# Altium PCB 天地通门禁20813.PcbDoc (part 1 of 2)
Units mm, origin at the board's own origin, x right, y up, seen from the top; angles counter-clockwise.
Board outline 102.79 x 72.64 mm, 2 copper layers (Top Layer, Bottom Layer); 108 components, 65 nets, 314 pads, 370 vias.
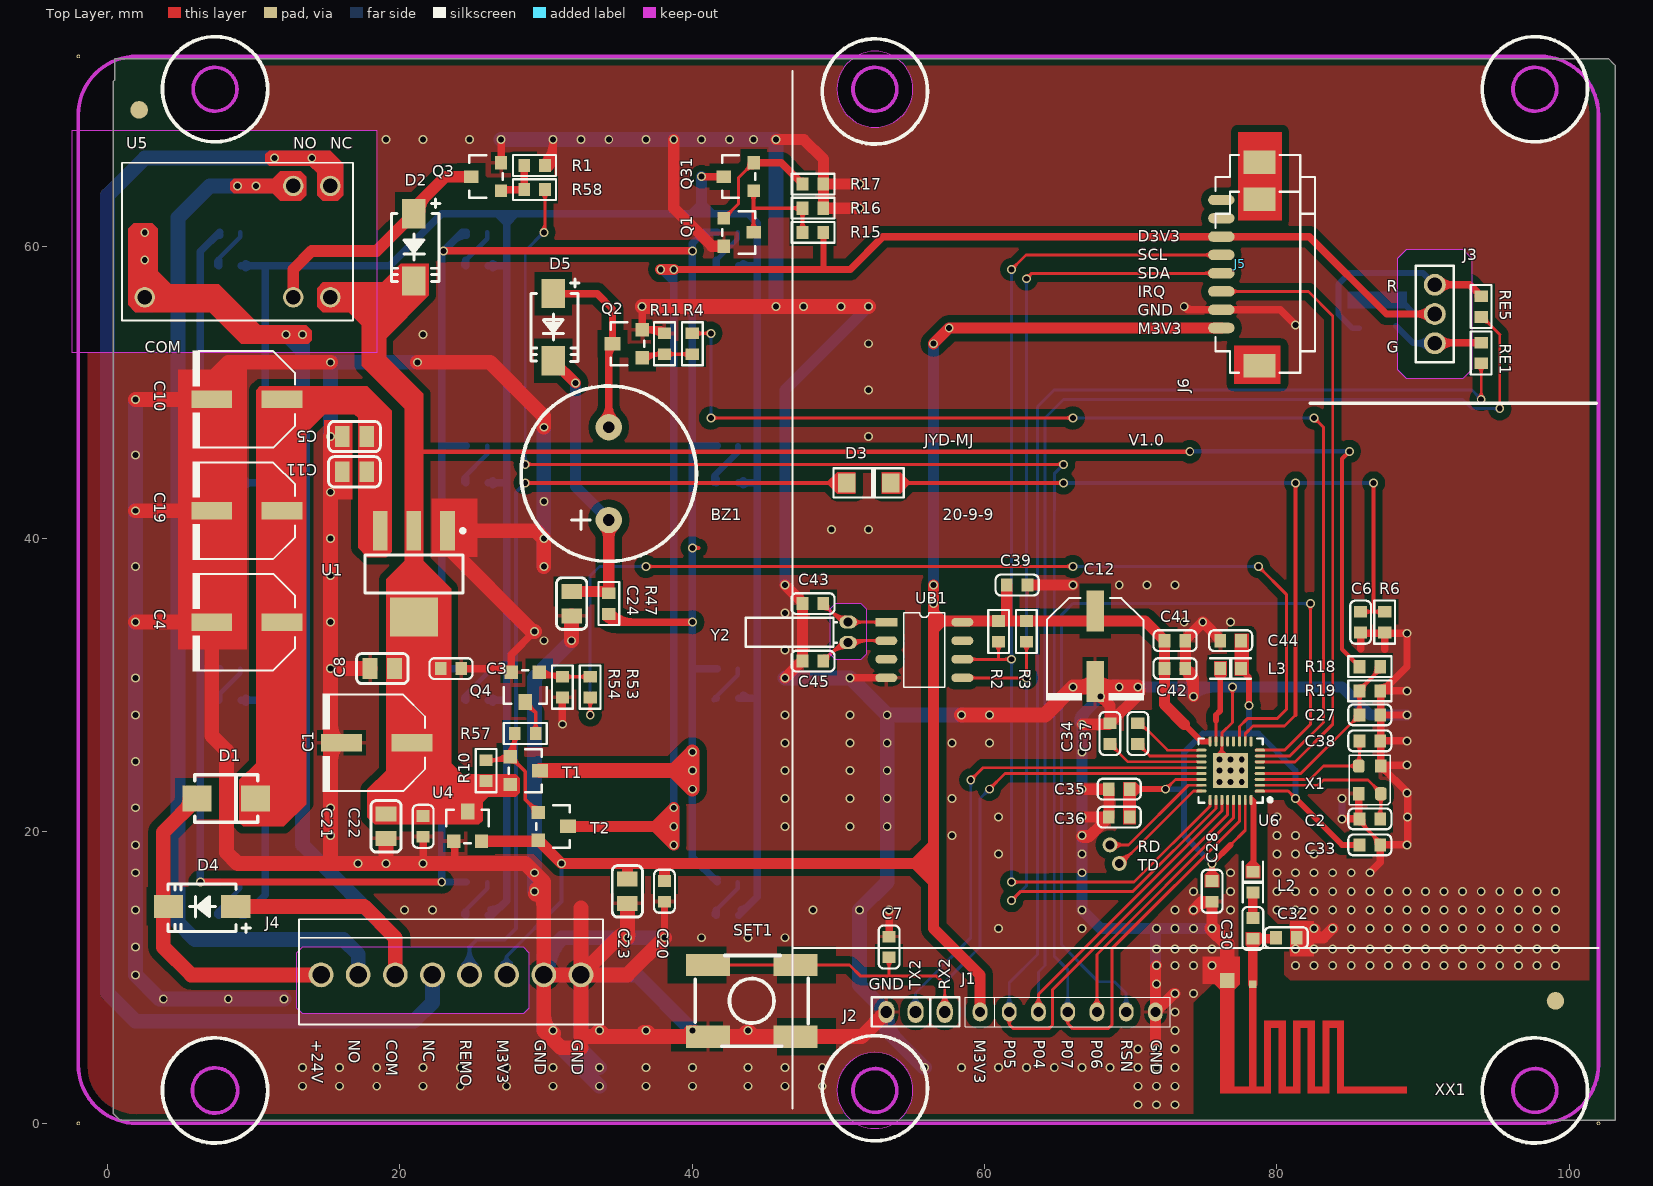
[diagram p0: Top Layer view]
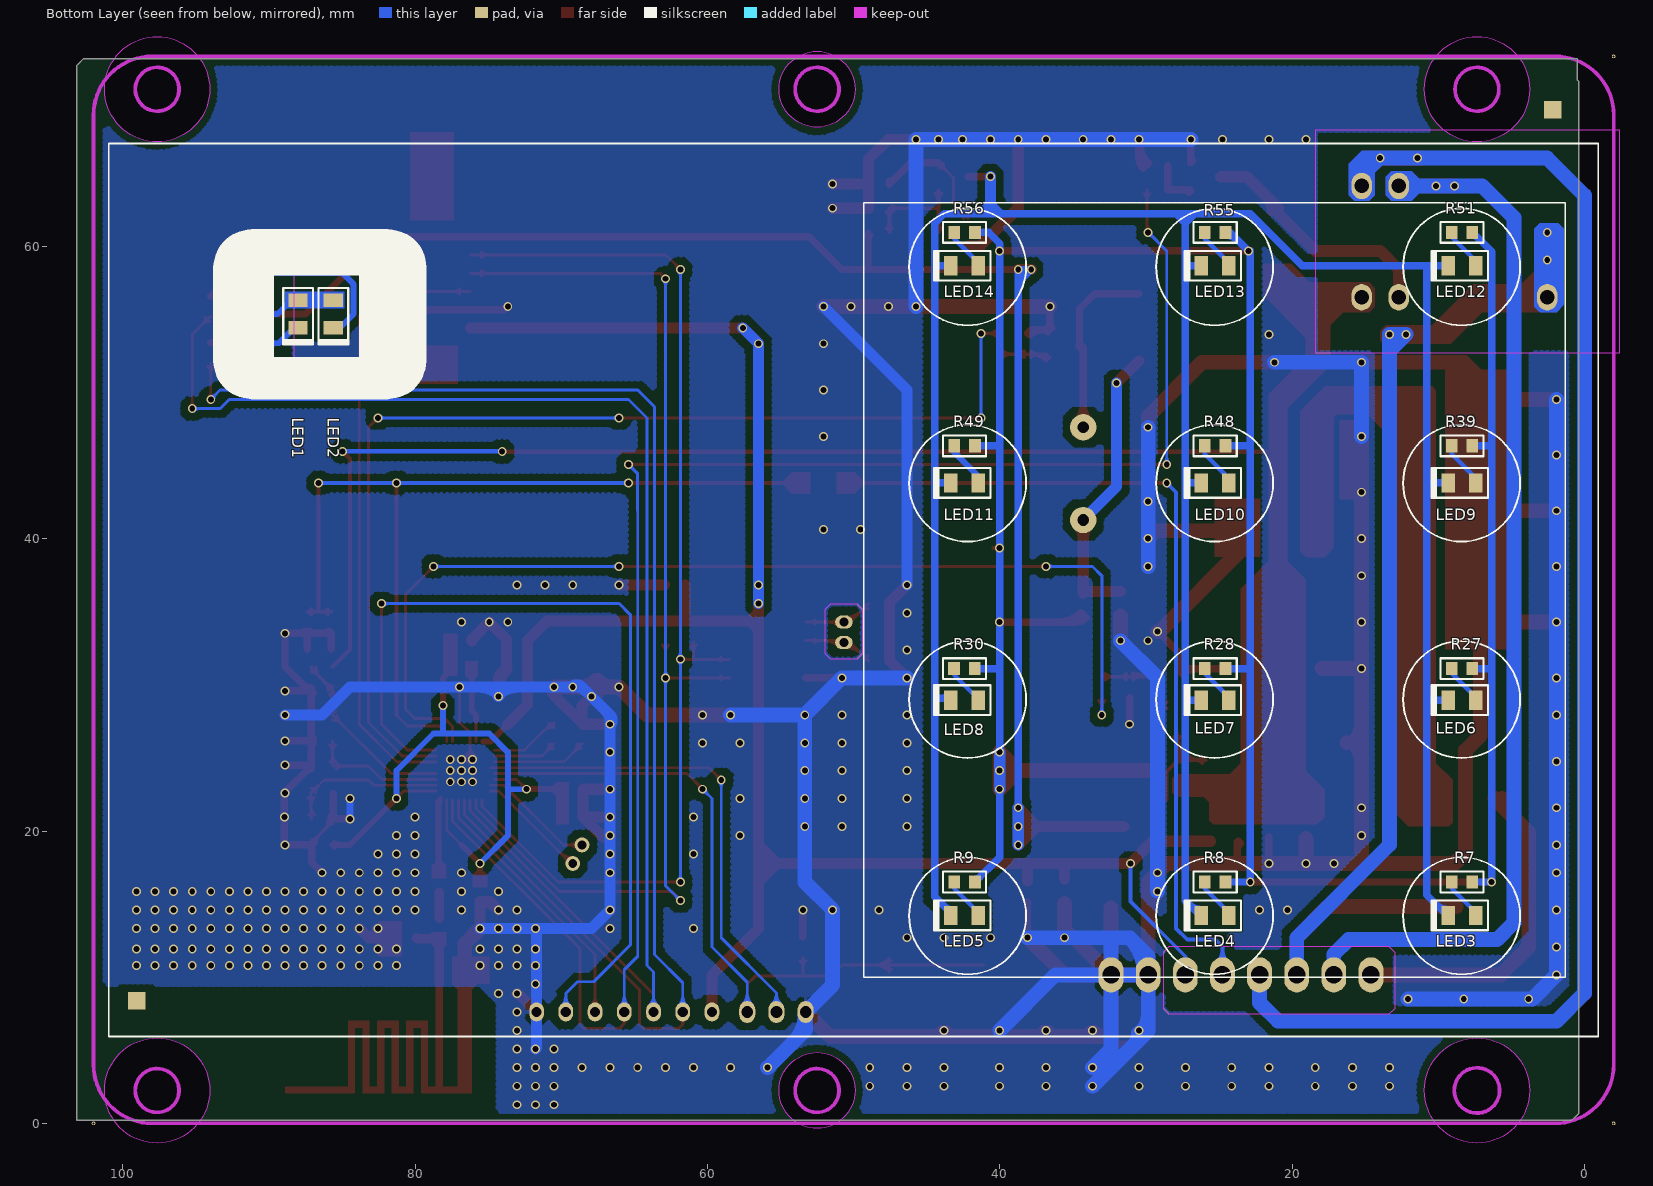
[diagram p1: Bottom Layer view, seen from below]
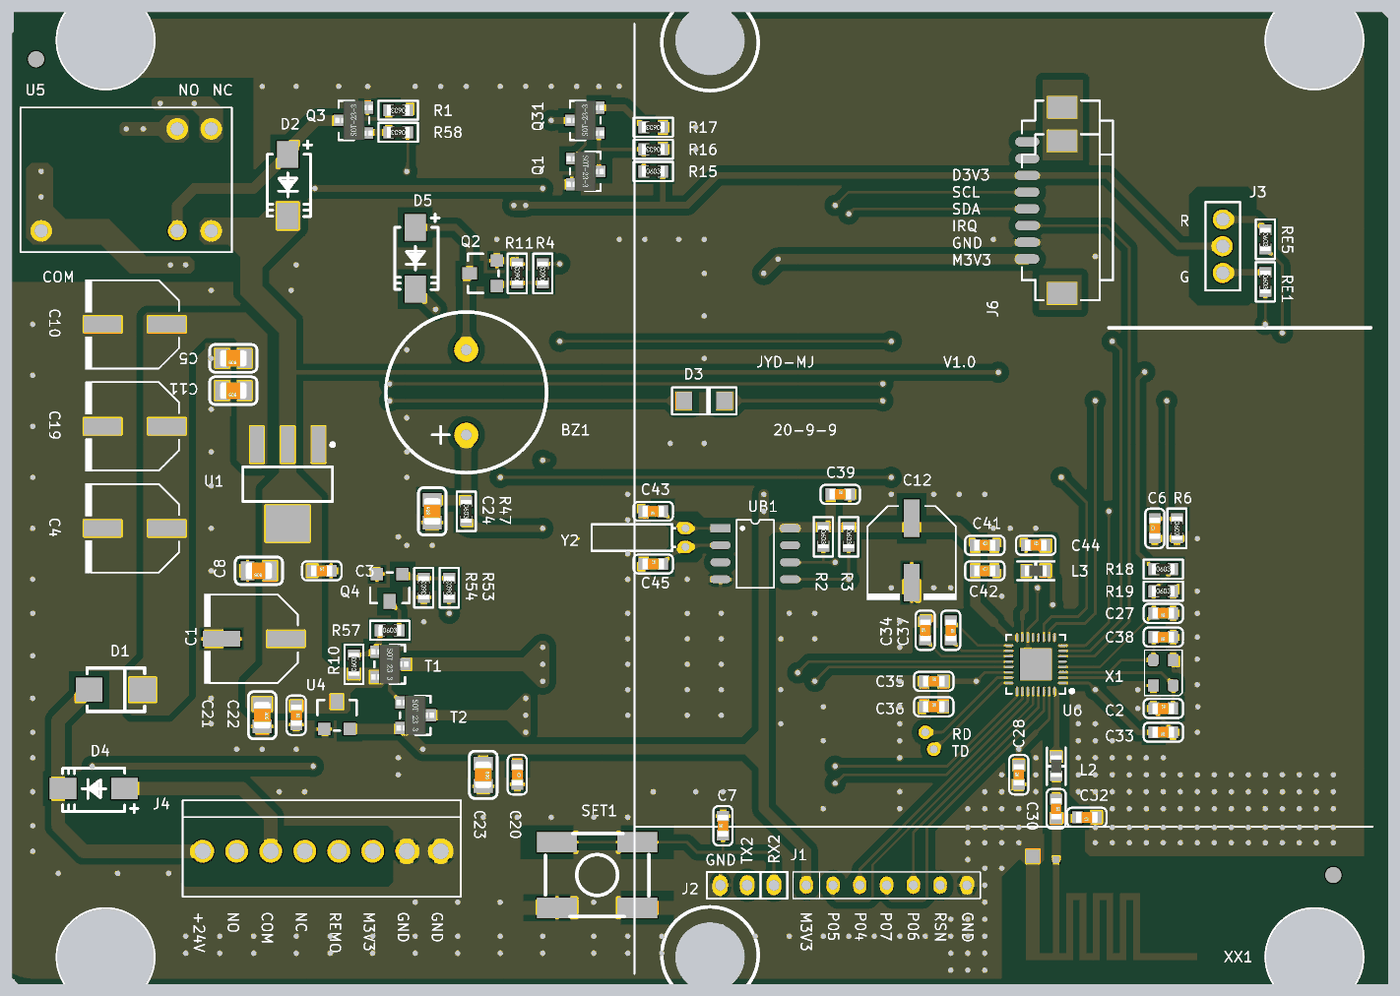
[diagram p3: 3D render of the assembled board from above, using the file's embedded part models]
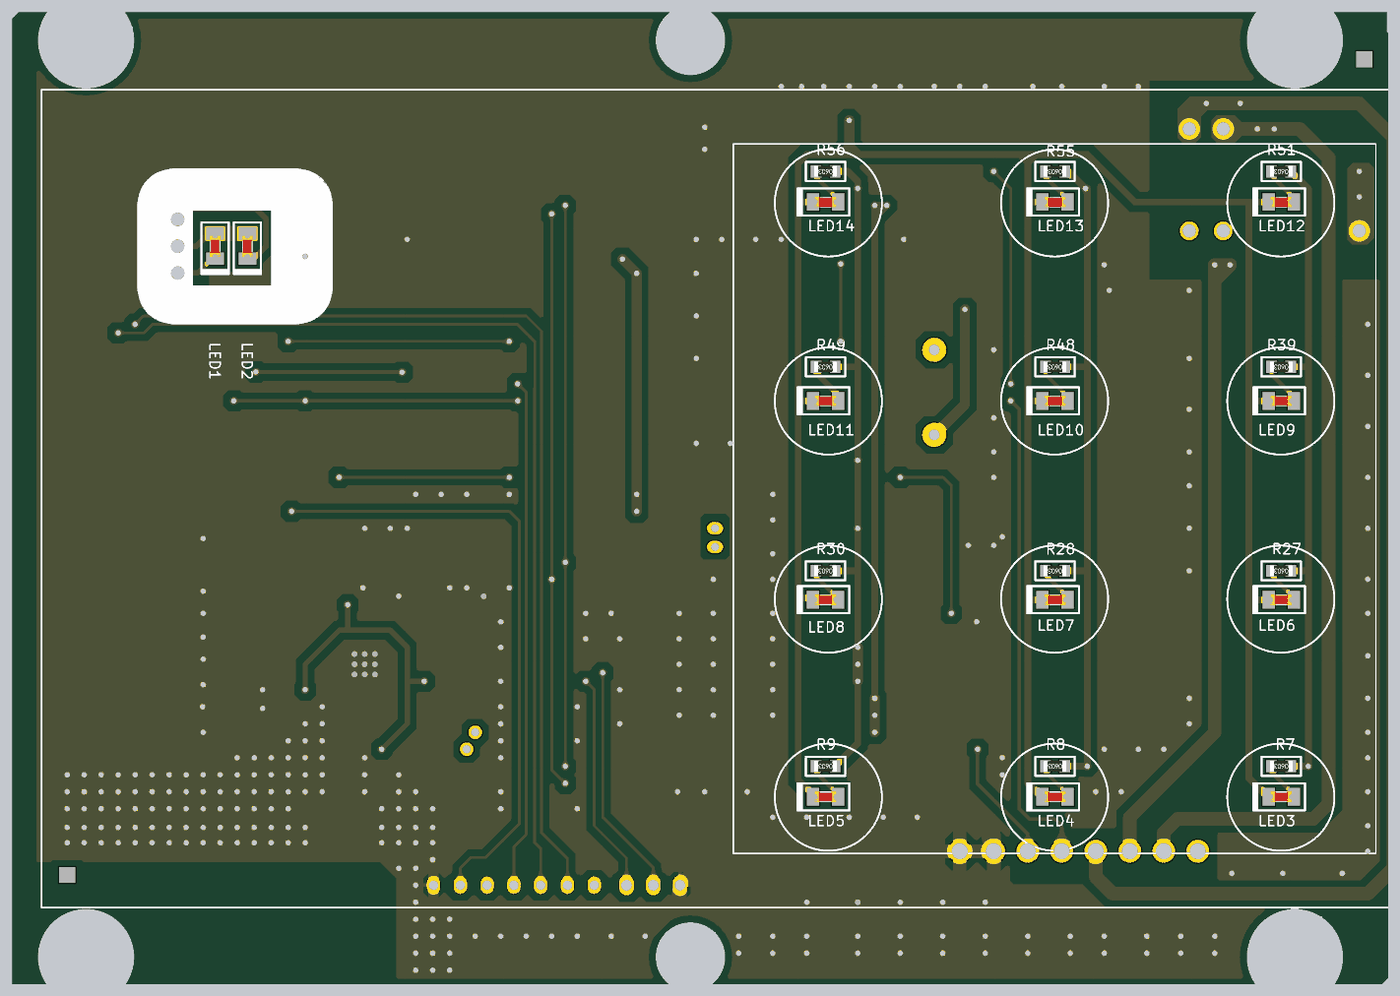
[diagram p4: 3D render of the assembled board from below, using the file's embedded part models]

## Layer stack, top to bottom
Top Layer: signal copper 0.0356
Dielectric: core 0.32, FR-4, Dk 4.8
Bottom Layer: signal copper 0.0356

## Board outline
0.5,71.406 0.373,71.279 0.373,0.692 0.856,0.21 103.167,0.21 103.167,72.371 103.04,72.498 102.684,72.854 0.475,72.854
cut-out: 52.5,4.85 ccw(c52.5,2.25) 49.9,2.25 ccw(c52.5,2.25) 52.5,-0.35 ccw(c52.5,2.25) 55.1,2.25 ccw(c52.5,2.25)
cut-out: 52.5,73.35 ccw(c52.5,70.75) 49.9,70.75 ccw(c52.5,70.75) 52.5,68.15 ccw(c52.5,70.75) 55.1,70.75 ccw(c52.5,70.75)
cut-out: 7.35,5.85 ccw(c7.35,2.25) 3.75,2.25 ccw(c7.35,2.25) 7.35,-1.35 ccw(c7.35,2.25) 10.95,2.25 ccw(c7.35,2.25)
cut-out: 7.35,74.35 ccw(c7.35,70.75) 3.75,70.75 ccw(c7.35,70.75) 7.35,67.15 ccw(c7.35,70.75) 10.95,70.75 ccw(c7.35,70.75)
cut-out: 97.65,74.35 ccw(c97.65,70.75) 94.05,70.75 ccw(c97.65,70.75) 97.65,67.15 ccw(c97.65,70.75) 101.25,70.75 ccw(c97.65,70.75)
cut-out: 97.65,5.85 ccw(c97.65,2.25) 94.05,2.25 ccw(c97.65,2.25) 97.65,-1.35 ccw(c97.65,2.25) 101.25,2.25 ccw(c97.65,2.25)

## Design rules (kind name [scope] priority, off if disabled: settings)
Clearance Clearance_2 [All] p1 off: gap=0.5
Clearance Clearance_1 [(InPoly)Or(IsKeepOut) vs (InPoly)Or(IsKeepOut)] p2 off: gap=0.508
Clearance [All] p3: gap=0.2
ComponentClearance [All] p1: gap=0 collisioncheckmode=3 verticalgap=0 showdistances=FALSE
FabricationTestpoint [(IsPad And (OnTopLayer Or OnBottomLayer))] p1: side=3 testpointundercomponent=TRUE minsize=1.016 maxsize=2.54 preferedsize=1.524 minholesize=0 maxholesize=1.016 preferedholesize=0.813 testpointgrid=0.025 allowsidetop=TRUE allowsidebottom=TRUE usegrid=TRUE gridtolerance=0
HoleSize [All] p1: absolutevalues=TRUE maxlimit=10 minlimit=0.025 maxpercent=80.000 minpercent=20.000
MinimumSolderMaskSliver [All] p1: minsoldermaskwidth=0
PolygonConnect PolygonConnect_2 [IsVia] p1: connectstyle=Direct reliefconductorwidth=0.254 reliefentries=4 polygonreliefangle="90 Angle" airgapwidth=0.254
PolygonConnect [All] p2: connectstyle=Relief reliefconductorwidth=0.254 reliefentries=4 polygonreliefangle="90 Angle" airgapwidth=0.254
RoutingVias [All] p1: holewidth=0.4 width=0.6 viastyle="Through Hole" minholewidth=0.4 minwidth=0.6 maxholewidth=0.5 maxwidth=0.8
ShortCircuit [All] p1: allowed=TRUE
SilkToSilkClearance [All] p1: silktosilkclearance=0
SilkToSolderMaskClearance [IsPad] p1: minsilkscreentomaskgap=0 clearancetoexposedcopper=TRUE
SolderMaskExpansion [All] p1: expansion=0.102
Width [All] p1: maxlimit=2 minlimit=0.1 preferedwidth=0.2
21 further rules are at their usual default settings.

## Components (designator, comment, footprint, x,y, rotation, side; value= is the part's Value field where it differs from the comment)
BZ1 "BUZZER" BUZZ_EN 34.29,41.275 r90 top
C1 "10uF" R6.3*5.8 18.415,26.035 r180 top
C2 "12pF" 0603C 86.36,20.828 r0 top
C3 "0.1uF" 0603C 23.495,31.115 r0 top
C4 "47uF/50V" R6.3*7.7 9.525,34.29 r180 top (schematic designator C2)
C5 "0.1uF/50V" 0805C 16.891,46.99 r180 top
C6 "10nF" 0603C 85.725,34.29 r90 top
C7 "1nF/6.3V" 0603C 53.467,12.065 r90 top
C8 "10uF" 0805C 18.796,31.115 r180 top
C10 "100UF/50V" R6.3*7.7 9.525,49.53 r180 top (schematic designator C4)
C11 "0.1uF/50V" 0805C 16.891,44.577 r180 top
C12 "220uF/6.3V" R6.3*5.8 67.564,32.639 r270 top
C19 "47uF/50V" R6.3*7.7 9.525,41.91 r180 top (schematic designator C3)
C20 "0.1uF" 0603C 38.1,15.875 r270 top
C21 "22uF/10V" 0805C 19.05,20.32 r270 top
C22 "0.1uF" 0603C 21.59,20.32 r270 top
C23 "10uF/10V" 0805C 35.56,15.875 r270 top
C24 "10uF/10V" 0805C 31.75,35.56 r90 top
C27 "1nF" 0603C 86.36,27.94 r180 top
C28 "1uF/6.3V" 0603C 75.565,15.875 r90 top
C30 "1.5pF" 0603C 78.359,13.335 r270 top
C32 "1pF" 0603C 80.645,12.7 r180 top
C33 "0.1uF" 0603C 86.36,19.05 r180 top
C34 "0.1uF" 0603C 68.58,26.67 r90 top
C35 "1uF" 0603C 69.215,22.86 r0 top
C36 "0.1uF" 0603C 69.215,20.955 r0 top
C37 "0.1uF" 0603C 70.485,26.67 r270 top
C38 "12pF" 0603C 86.36,26.162 r180 top
C39 "0.1uF" 0603C 62.23,36.83 r0 top
C41 "10uF/6.3V" 0603C 73.025,33.02 r0 top
C42 "0.1uF" 0603C 73.025,31.115 r0 top
C43 "22pF" 0603C 48.26,35.56 r180 top
C44 "10uF/6.3V" 0603C 76.835,33.02 r0 top
C45 "22pF" 0603C 48.26,31.623 r0 top
D1 "SS14" DO-214AA 8.12,22.225 r180 top
D2 "1N4001" M7 20.955,62.23 r270 top (schematic designator D7)
D3 "1N4148" SOD-123 52.07,43.815 r0 top
D4 "1N4001" M7 8.763,14.839 r180 top
D5 "1N4001" M7 30.48,56.769 r270 top
J1 "7P" 7P-2.0MM 59.69,7.62 r0 top
J2 "Header 3" 3P-2.0MM 57.277,7.62 r180 top (schematic designator P4)
J3 "Header 3" 3PIN-2.0 90.805,55.372 r270 top
J4 "2.54接插座" 2.54螺丝接线座8P 32.385,10.16 r180 top (schematic designator P1)
J5 "Header 8" 8P-1.25mm 76.2,58.801 r90 top
J6 "Header 6" 6P-1.25mm 76.2,57.531 r90 top
L2 "2nH" 0603L 78.359,16.51 r90 top
L3 "2.2uH" 0603L 76.835,31.115 r180 top
LED1 "Green" 0805LED 88.011,55.372 r270 bottom
LED2 "Red" 0805LED 85.598,55.372 r270 bottom
LED3 "Blue" 0805LED 8.374,14.224 r0 bottom
LED4 "Blue" 0805LED 25.265,14.224 r0 bottom
LED5 "Blue" 0805LED 42.41,14.224 r0 bottom
LED6 "Blue" 0805LED 8.374,28.956 r0 bottom
LED7 "Blue" 0805LED 25.265,28.956 r0 bottom
LED8 "Blue" 0805LED 42.418,28.956 r0 bottom
LED9 "Blue" 0805LED 8.374,43.815 r0 bottom
LED10 "Blue" 0805LED 25.265,43.815 r0 bottom
LED11 "Blue" 0805LED 42.41,43.815 r0 bottom
LED12 "Blue" 0805LED 8.374,58.674 r0 bottom
LED13 "Blue" 0805LED 25.265,58.674 r0 bottom
LED14 "Blue" 0805LED 42.41,58.674 r0 bottom
Q1 "SS8050" "SOT-23 - BCE" 43.18,60.96 r270 top (schematic designator Q31)
Q2 "SS8050" SOT-23-3L 35.56,53.34 r90 top (schematic designator T1)
Q3 "SS8050" "SOT-23 - BCE" 25.9,64.77 r90 top
Q4 "PMBT3904" SOT-23-3L 28.575,29.845 r180 top (schematic designator T2)
Q31 "SS8050" "SOT-23 - BCE" 43.18,64.77 r90 top
R1 "15k" 0603R 29.21,65.532 r180 top
R2 "10K" 0603R 60.96,33.655 r270 top
R3 "10K" 0603R 62.865,33.655 r270 top
R4 "1k" 0603R 40.005,53.34 r90 top
R6 "10K" 0603R 87.376,34.29 r270 top
R7 "100R" 0603R 8.374,16.51 r0 bottom
R8 "100R" 0603R 25.265,16.51 r0 bottom
R9 "100R" 0603R 42.41,16.51 r0 bottom
R10 "100K" 0603R 25.9,24.13 r90 top
R11 "20K" 0603R 38.1,53.34 r90 top
R15 "4.7K" 0603R 48.26,60.96 r0 top
R16 "47K" 0603R 48.26,62.611 r180 top
R17 "33R" 0603R 48.26,64.262 r180 top (schematic designator R15)
R18 "510K%1" 0603R 86.36,31.242 r0 top
R19 "130K%1" 0603R 86.36,29.591 r0 top
R27 "100R" 0603R 8.374,31.115 r0 bottom
R28 "100R" 0603R 25.265,31.115 r0 bottom
R30 "100R" 0603R 42.418,31.115 r0 bottom
R39 "100R" 0603R 8.374,46.355 r0 bottom
R47 "10R" 0603R 34.29,35.56 r270 top
R48 "100R" 0603R 25.265,46.355 r0 bottom
R49 "100R" 0603R 42.41,46.355 r0 bottom
R51 "100R" 0603R 8.374,60.96 r0 bottom
R53 "4.7K" 0603R 33.02,29.845 r90 top
R54 "20K" 0603R 31.115,29.845 r90 top
R55 "100R" 0603R 25.265,60.96 r0 bottom
R56 "100R" 0603R 42.41,60.96 r0 bottom
R57 "1K" 0603R 28.575,26.67 r0 top
R58 "1k" 0603R 29.21,63.881 r180 top
RE1 "1K" 0603R 93.98,52.705 r270 top
RE5 "1K" 0603R 93.98,55.88 r270 top
SET1 "SW-PB" KEY-S 44.069,8.382 r180 top
T1 "SI2301" "SOT-23 - GDS" 28.575,24.13 r270 top (schematic designator Q1)
T2 "SI2301" "SOT-23 - GDS" 30.48,20.32 r270 top (schematic designator Q2)
U1 "AMS1117-5" SOT223_M 20.955,37.592 r270 top
U4 "HT7533" SOT-23-3L 24.63,20.32 r0 top
U5 "5V" 继电器1X 15.24,56.515 r180 top
U6 "BK3431Q" QFN32_4*4*0.4 76.835,24.13 r180 top
UB1 "PCF8563" SOP8 55.88,32.385 r0 top
X1 "16MHZ" XTAL3225 86.36,23.495 r90 top
XX1 "TIANX" BT_NAMI_1 78.359,9.525 r180 top
Y2 "32.768KHZ" 晶振-9 50.665,32.893 r90 top

## Footprints (in the part's own frame and the unit in brackets; to place one, negate y for a bottom-side part, rotate by r counter-clockwise, add the part's x,y. Pads: shape width x height; smd on the part's side, far side on the other; paste and mask are expansions set on the pad)
2.54螺丝接线座8P [mm]
  round 1.7 / inner round 1.7 / far side oval 1.7x2.4 hole 1.2: 1(0,0) 2(2.54,0) 3(5.08,0) 4(7.62,0) 5(10.16,0) 6(12.7,0) 7(15.24,0) 8(17.78,0)
  silkscreen extent -1.5,-3.8 19.28,3.4
3P-2.0MM [mm]
  oval 1.1x1.5 hole 0.8 mask+0.05: 1(0,0) 2(2,0) 3(4,0)
  silkscreen extent -1,-1 5,1
3PIN-2.0 [mm]
  round 1.5 hole 1: 1(-2,0) 2(0,0) 3(2,0)
  silkscreen extent -3.3,-1.3 3.3,1.3
6P-1.25mm [mm]
  oval 0.7x1.8 smd mask+0.05: 1(-3.125,0) 2(-1.875,0) 3(-0.625,0) 4(0.625,0) 5(1.875,0) 6(3.125,0)
  rect 1.6x2.2 smd mask+0.05: 7(-5.7,-2.6) 8(5.7,-2.6)
  silkscreen extent -6.2,-6.4 6.2,0.4
7P-2.0MM [mm]
  oval 1x1.3 hole 0.7 mask+0.05: 1(0,0) 2(2,0) 3(4,0) 4(6,0) 5(8,0) 6(10,0) 7(12,0)
  silkscreen extent -1,-1 13,1
8P-1.25mm [mm]
  oval 0.7x1.8 smd mask+0.05: 1(-4.375,0) 2(-3.125,0) 3(-1.875,0) 4(-0.625,0) 5(0.625,0) 6(1.875,0) 7(3.125,0) 8(4.375,0)
  rect 1.6x2.2 smd mask+0.05: 9(-6.95,-2.6) 10(6.95,-2.6)
  silkscreen extent -7.45,-6.4 7.45,0.4
0603C [mm]
  rect 0.8x0.9 smd: 1(-0.711,0) 2(0.711,0)
  silkscreen extent -1.47,-0.71 1.47,0.71, body extent -0.8,-0.4 0.8,0.4, height 0.3
0603L [mm]
  rect 0.8x0.9 smd: 1(-0.711,0) 2(0.711,0)
  silkscreen extent -1.4,-0.7 1.4,0.7, body extent -0.82,-0.41 0.83,0.41, height 0.46
0603R [mm]
  rect 0.8x0.9 smd: 1(-0.711,0) 2(0.711,0)
  silkscreen extent -1.47,-0.71 1.47,0.71, body extent -0.85,-0.4 0.85,0.4, height 0.56
0805C [mil]
  rect 40x56 smd: 1(-33,0) 2(33,0)
  silkscreen extent -70,-41 70,41, body extent -39,-25 39,25, height 30
0805LED [mil]
  rect 36x52 smd: 1(-37,0) 2(37,0)
  silkscreen extent -70,-40 82,40, body extent -31,-16 31,16, height 24
BT_NAMI_1 [mm]
  rect 0.5x0.5 smd: 1(0,0)
  rect 1x1 smd: 2(1.75,-0.25)
  Top Layer region: -10.55,7 -5.75,7 -5.75,7.5 -10.55,7.5
  Top Layer region: -6.25,2.5 -5.75,2.5 -5.75,7.5 -6.25,7.5
  Top Layer region: -6.25,2.5 -4.75,2.5 -4.75,3 -6.25,3
  Top Layer region: -5.25,2.5 -4.75,2.5 -4.75,7.5 -5.25,7.5
  Top Layer region: -5.25,7 -3.75,7 -3.75,7.5 -5.25,7.5
  Top Layer region: -4.25,2.5 -3.75,2.5 -3.75,7.5 -4.25,7.5
  Top Layer region: -4.25,2.5 -2.75,2.5 -2.75,3 -4.25,3
  Top Layer region: -3.25,2.5 -2.75,2.5 -2.75,7.5 -3.25,7.5
  Top Layer region: 1.25,0 2.25,0 2.25,7.5 1.25,7.5
  Top Layer region: -0.25,0 0.25,0 0.25,7.5 -0.25,7.5
  Top Layer region: -1.25,7 2.25,7 2.25,7.5 -1.25,7.5
  Top Layer region: -1.25,2.5 -0.75,2.5 -0.75,7.5 -1.25,7.5
  Top Layer region: -2.25,2.5 -0.75,2.5 -0.75,3 -2.25,3
  Top Layer region: -2.25,2.5 -1.75,2.5 -1.75,7.5 -2.25,7.5
  Top Layer region: -3.25,7 -1.75,7 -1.75,7.5 -3.25,7.5
BUZZ_EN [mm]
  round 1.8 hole 0.8: 1(0,0) 2(6.35,0)
  silkscreen extent -2.82,-6 9.17,6
DO-214AA [mm]
  rect 2x1.8 smd: 1(2,0) 2(-2,0)
  silkscreen extent -2.15,-1.63 2.15,1.63
KEY-S [mm]
  rect 3x1.524 smd: 1(3,2.45) 1/2(-3,2.45) 2(-3,-2.45) 2/2(3,-2.45)
  silkscreen extent -3.86,-3.1 3.86,3.1
M7 [mm]
  rect 2x1.6 smd: A(0,0) K(4.6,0)
  silkscreen extent -1,-1.53 4.64,1.78
QFN32_4*4*0.4 [mm]
  rect 2.4x2.4 smd paste-0.025 mask+0.051: 0(0,0)
  oval 0.7x0.2 smd paste-0.025 mask+0.051: 1(-2,1.4) 2(-2,1) 3(-2,0.6) 4(-2,0.2) 5(-2,-0.2) 6(-2,-0.6) 7(-2,-1) 8(-2,-1.4) 17(2,-1.4) 18(2,-1) 19(2,-0.6) 20(2,-0.2) 21(2,0.2) 22(2,0.6) 23(2,1) 24(2,1.4)
  oval 0.2x0.7 smd paste-0.025 mask+0.051: 9(-1.4,-2) 10(-1,-2) 11(-0.6,-2) 12(-0.2,-2) 13(0.2,-2) 14(0.6,-2) 15(1,-2) 16(1.4,-2) 25(1.4,2) 26(1,2) 27(0.6,2) 28(0.2,2) 29(-0.2,2) 30(-0.6,2) 31(-1,2) 32(-1.4,2)
  silkscreen extent -2.82,-2.2 2.2,2.2
R6.3*5.8 [mm]
  rect 2.8x1.2 smd: 1(-2.4,0) 2(2.4,0)
  silkscreen extent -3.3,-3.36 3.7,3.36
R6.3*7.7 [mm]
  rect 2.8x1.2 smd: 1(-2.4,0) 2(2.4,0)
  silkscreen extent -3.3,-3.36 3.7,3.36
SOD-123 [mm]
  rect 1.2x1.3 smd mask+0.05: 1(-1.5,0) 2(1.5,0)
  silkscreen extent -2.4,-1 2.4,1
SOP8 [mm]
  rect 1.5x0.6 smd mask+0.05: 1(-2.6,1.905)
  oval 1.5x0.6 smd mask+0.05: 2(-2.6,0.635) 3(-2.6,-0.635) 4(-2.6,-1.905) 5(2.6,-1.905) 6(2.6,-0.635) 7(2.6,0.635) 8(2.6,1.905)
  round 0.4 on Top Overlay mask+0.05: ""(-0.949,1.905)
  silkscreen extent -1.4,-2.54 1.4,2.54
SOT223_M [mm] "SOT223, 4-Leads, Body 6.5x3.5mm, Pitch 2.3mm, Lead Span 7mm, IPC Low Density"
  rect 2.7x1 smd: 1(-2.95,2.3) 2(-2.95,0) 3(-2.95,-2.3)
  rect 2.7x3.3 smd: 4(2.95,0)
  silkscreen extent -3.07,-3.35 1.3,3.48, body extent -1.85,-3.35 1.85,3.35, height 1.7
"SOT-23 - BCE" [mm]
  rect 0.85x0.85 smd: B(-0.95,-1.016)
  rect 0.85x1 smd: C(0,1.016)
  rect 0.914x0.85 smd: E(0.95,-1.016)
  silkscreen extent -1.46,-1.14 1.46,1.14, body extent -1.45,-1.4 1.45,1.4, height 1.2
"SOT-23 - GDS" [mil]
  rect 36x43.31 smd: D(0,40)
  rect 36x36 smd: G(-37.4,-40) S(37.4,-40)
  silkscreen extent -57,-45 58,45, body extent -57,-55 57,55, height 47
SOT-23-3L [mil]
  rect 36x36 smd: 1(-37.4,-40) 2(37.4,-40)
  rect 36x43.31 smd: 3(0,40)
  silkscreen extent -57,-45 58,45
XTAL3225 [mm]
  rrect50% 0.9x0.8 smd: 1(-0.95,-0.75) 3(0.95,0.75)
  rect 0.9x0.8 smd: 2(0.95,-0.75) 4(-0.95,0.75)
  silkscreen extent -1.7,-1.4 1.7,1.4
晶振-9 [mm]
  oval 0.9x1.2 hole 0.6: 1(0,0) 2(1.4,0)
  rect 0x0 smd: 3(0.635,8)
  silkscreen extent -0.3,0.76 1.7,7
继电器1X [mm]
  round 1.4 / inner round 1.4 / far side oval 1.4x1.8 hole 1: 1(0,-7.62) 2(0,0) 3(2.54,-7.62) 4(2.54,0) 5(12.7,0)
  silkscreen extent -1.55,-9.21 14.25,1.59

## Part data
BZ1: "Buzzer"
C1 C4 C8 C10 C12 C19 C21 C23: library part CAP-P, "Capacitor, tolerance ±20%"
C2 C6 C7 C28 C30 C32 C33 C34 C35 C36 C37 C38 C41 C42 C44: library part Cap, "Capacitor"
C3 C5 C11: library part "CAP NP"
C20 C22 C27: library part CAP-NP, "Capacitor, Ceramic"
C24: library part C_0_Dup1
C39 C43 C45: library part C
D1 D2 D3 D4 D5: library part D
J2 J3: "Header, 3-Pin"
J4: library part "Header 8", "Header, 8-Pin"
J5: "Header, 8-Pin"
J6: "Header, 6-Pin"
L2 L3: "Power Inductor, 4.7uH, 0.7A, 260mR DCR"
LED1 LED2 LED3 LED4 LED5 LED6 LED7 LED8 LED9 LED10 LED11 LED12 LED13 LED14: library part LED
Q1 Q3 Q31: library part PMBT3904
Q2 Q4: library part NPN_BJT, "Bipolar Junction Transistor"
R1 R6 R7 R8 R9 R10 R15 R16 R17 R27 R28 R30 R39 R48 R49 R51 R53 R54 R55 R56 R57 R58 RE1 RE5: library part R
R2 R3: library part RES
R4 R11 R47: library part R_Dup1
R18 R19: library part Res2, "Resistor"
SET1: "Switch"
T1 T2: library part PWRMOSFET_EP_DGS_0
U1 U4: library part XC6206P302M
U5: library part OMRON_G8P-1A4P
UB1: library part IC8
Y2: library part 晶振

## Free pads (board coordinates)
  round 0.254 hole 0.127: 1(-2,0) 2(-2,73) 3(102,0)
  round 1.016 hole 0.61: 1(69.215,17.78) 2(68.58,19.05)
  round 1 hole 3 unplated: 4(7.35,70.75) 5(7.35,2.25) 6(52.5,70.75) 7(52.5,2.25) 8(97.65,70.75) 9(97.65,2.25)
  round 1.2 smd: MARK(2.159,69.342) MARK(99.06,8.382)
  rect 1.2x1.2 smd far side: MARK(2.159,69.342) MARK(99.06,8.382)

## Via types
v1: diameter 0.61, hole 0.406, Top Layer to Bottom Layer, tented both sides, 370 vias

## Nets (pads, with @x,y where several pads share a name; then routed paths per layer and width w, separated by ;. In a path a pad name is that pad's centre, name@x,y a point inside that pad or via, vN(x,y) a via of type N, cw(c..) or ccw(c..) an arc to the next point about the centre after c; other vN are vias at no path point)
5V: C1.1 C3.1 C8.1 C21.1 C22.1 D2.K R10.1 R18.1 T1.S U1.2 U1.4 U4.3 U5.2 | length 147.6
  Top Layer w0.3: 20.955,45.974 20.976,45.953 v1(74.041,45.953) ; v1(84.963,45.974) 84.455,45.466 84.455,32.436 R18.1@85.649,31.242
  Top Layer w1.016: U5.2@15.24,56.515 18.415,56.515 ; C21.1@19.05,21.158 19.05,22.225 20.005,23.18 21.59,23.18 ; 20.115,56.79 cw(c20.955,55.95) D2.K@20.955,57.138 ; U1.4@20.36,35.237 ccw(c18.922,36.675) 20.955,36.675 ccw(c22.988,36.675) U1.4@21.55,35.237 ; U1.4@20.66,34.047 cw(c18.413,31.8) 21.59,31.8 ; D2.K@20.729,57.614 cw(c18.415,59.499) 18.415,56.515 ; D2.K@20.955,57.63 19.84,56.515 18.415,56.515 ; C1.1@21.021,26.029 ccw(c19.646,27.404) 21.59,27.404 ; C1.1@21.021,26.041 cw(c19.646,24.666) 21.59,24.666 ; C22.1@21.59,21.031 21.59,23.18 ; C3.1@22.784,31.115 21.59,31.115 ; U4.3@24.63,21.336 24.63,23.18 ; T1.S@27.424,23.18 24.63,23.18 ; 18.415,56.515 18.415,52.07 20.955,49.53 20.955,45.974 U1.2@20.955,40.542 20.955,35.15 21.59,34.515 21.59,31.115 ; 21.59,23.18 24.63,23.18 ; 21.59,23.18 21.59,31.115
  Bottom Layer w0.3: v1(74.041,45.953) 74.062,45.974 v1(84.963,45.974)
20V: C4.1 C5.1 C10.1 C11.1 C19.1 D1.2 U1.3 | length 48.4
  Top Layer w0.8: D1.2@10.12,22.225 12.065,24.17 12.065,49.255 11.79,49.53 17.272,49.53 18.655,48.147 18.655,46.99 U1.3@18.655,41.05 ; D1.2@10.22,22.725 ccw(c10.22,23.691) D1.2@10.903,23.008 ; D1.2@10.72,22.225 cw(c12.169,22.225) 11.144,23.249 ; C4.1@11.784,34.149 cw(c11.104,33.469) 12.065,33.469 ; C4.1@11.784,34.431 ccw(c11.104,35.111) 12.065,35.111 ; C19.1@11.784,41.769 cw(c11.104,41.089) 12.065,41.089 ; C19.1@11.784,42.051 ccw(c11.104,42.731) 12.065,42.731 ; C10.1@11.784,49.389 cw(c11.104,48.709) 12.065,48.709
24V: D1.1 D4.K J4.8 | length 23.6
  Top Layer w1.016: D1.1@5.28,21.385 ccw(c4.44,22.225) D1.1@5.628,22.225 ; D1.1@6.12,22.225 3.81,19.915 3.81,12.065 5.715,10.16 J4.8@14.605,10.16
BAT_ADC: C27.2 R18.2 R19.1 U6.4 | length 17.9
  Top Layer w0.2: U6.4@78.581,23.93 81.639,23.93 C27.2@85.649,27.94 ; 85.051,27.343 cw(c85.649,26.745) C27.2@85.649,27.59 ; 85.172,27.463 ccw(c84.745,27.89) C27.2@85.349,27.89
  Top Layer w0.254: C27.2@85.456,28.183 ccw(c84.99,28.649) 85.649,28.649 ccw(c86.308,28.649) C27.2@85.842,28.183 ; R19.1@85.456,29.348 cw(c84.99,28.882) 85.649,28.882 cw(c86.308,28.882) R19.1@85.842,29.348 ; C27.2@85.649,27.94 R19.1@85.649,29.591 85.649,29.642 87.071,31.064 R18.2@87.071,31.242 ; R19.1@85.649,29.914 ccw(c85.649,30.571) 86.113,30.106 ; R19.1@85.922,29.641 cw(c86.583,29.641) 86.115,30.108 ; 86.515,30.508 ccw(c85.831,31.192) R18.2@86.798,31.192 ; R18.2@86.823,30.816 cw(c87.071,30.568) R18.2@87.071,30.919
BEEP: R4.2 U6.7 | length 82.3
  Top Layer w0.2: U6.7@78.581,25.13 80.883,25.13 83.185,27.432 83.185,47.625 v1(82.55,48.26) ; v1@82.55,48.055 cw(c82.55,47.561) 82.9,47.91 cw(c83.249,48.26) v1@82.755,48.26
  Top Layer w0.203: R4.2@40.005,54.051 v1(41.275,54.051) ; R4.2@40.266,53.84 cw(c40.775,53.331) 40.775,54.051 cw(c40.775,54.772) R4.2@40.266,54.262 ; v1@41.131,53.908 ccw(c40.784,53.561) 40.784,54.051 ccw(c40.784,54.542) v1@41.131,54.195 ; v1(41.275,48.26) v1(66.04,48.26) ; v1@41.419,48.116 cw(c41.766,47.769) 41.766,48.26 cw(c41.766,48.751) v1@41.419,48.404 ; v1@65.896,48.116 ccw(c65.549,47.769) 65.549,48.26 ccw(c65.549,48.751) v1@65.896,48.404
  Bottom Layer w0.203: v1@41.131,48.404 ccw(c40.784,48.751) 41.275,48.751 ccw(c41.766,48.751) v1@41.419,48.404 ; v1@41.131,53.908 cw(c40.784,53.561) 41.275,53.561 cw(c41.766,53.561) v1@41.419,53.908 ; v1(41.275,48.26) v1(41.275,54.051) ; v1(66.04,48.26) v1(82.55,48.26) ; v1@66.184,48.116 cw(c66.531,47.769) 66.531,48.26 cw(c66.531,48.751) v1@66.184,48.404 ; v1@82.406,48.116 ccw(c82.059,47.769) 82.059,48.26 ccw(c82.059,48.751) v1@82.406,48.404
COM: D4.A J4.6 U5.5 | length 75.4
  Top Layer w1: U5.5@2.54,56.515 7.239,56.515 9.779,53.975 v1(12.192,53.975) v1(13.335,53.975) ; D4.A@8.763,14.839 17.546,14.839 19.685,12.7 J4.6@19.685,10.16
  Bottom Layer w1: J4.6@19.685,10.16 19.685,12.7 13.335,19.05 13.335,52.832 ; 13.335,52.832 v1(12.192,53.975) v1(13.335,53.975) 13.335,52.832
  other v1: 2.54,59.055 2.54,60.96
GND: C1.2 C2.1 C3.2 C4.2 C5.2 C6.1 C7.2 C8.2 C10.2 C11.2 C12.2 C19.2 C20.2 C21.2 C22.2 C23.2 C24.1 C27.1 C28.1 C32.1 C33.1 C34.2 C35.1 C36.1 C38.1 C39.2 C41.2 C42.2 C43.2 C44.1 C45.1 J1.7 J2.3 J4.1 J4.2 J5.2 J6.2 Q1.E Q2.2 Q3.E Q4.2 R1.1 R6.2 R11.2 R16.1 R17.1 R19.2 R54.1 SET1.1 U1.1 U4.1 U6.0 U6.14 UB1.4 X1.2 X1.4 XX1.1 XX1.2 | length 736.5
  Top Layer w0.2: U6.0@75.928,25.037 ccw(c75.187,25.778) 76.235,25.778 ; U6.0@76.07,24.895 ccw(c75.67,25.295) U6.0@76.235,25.295 ; U6.0@76.235,24.73 U6.14@76.235,26.13 76.235,26.705 76.962,27.432 v1(76.962,29.845) ; v1@76.817,29.7 cw(c76.468,29.351) 76.962,29.351 cw(c77.456,29.351) v1@77.107,29.7
  Top Layer w0.254: C2.1@85.649,20.505 cw(c85.649,20.154) C2.1@85.897,20.402 ; C2.1@85.649,20.828 85.649,20.65 87.071,19.228 C33.1@87.071,19.05 ; C2.1@85.922,20.778 ccw(c86.889,20.778) 86.205,20.094 ; 86.515,19.784 cw(c85.831,19.1) C33.1@86.798,19.1 ; C33.1@86.823,19.476 ccw(c87.071,19.724) C33.1@87.071,19.373
  Top Layer w0.5: v1(21.59,17.78) C22.2@21.59,19.609 ; U4.1@23.533,19.157 cw(c23.013,18.637) 23.749,18.637 ; U4.1@23.68,19.304 23.749,19.235 23.749,17.78 ; v1(50.8,30.48) UB1.4@53.28,30.48
  Top Layer w0.508: C3.2@24.206,31.115 Q4.2@27.625,31.115 ; 26.521,31.115 cw(c26.521,29.757) Q4.2@27.481,30.717 ; Q3.E@26.795,65.873 ccw(c26.484,66.184) 26.924,66.184 ; Q3.E@26.916,65.72 26.924,65.728 v1(26.924,67.31) ; Q4.2@27.481,31.005 ccw(c27.134,31.352) 27.625,31.352 ccw(c28.116,31.352) Q4.2@27.769,31.005 ; Q4.2@27.625,30.861 Q4.2@27.625,31.115 ; v1(29.21,33.655) 27.625,32.07 Q4.2@27.625,31.115 ; R1.1@29.818,65.685 ccw(c28.22,67.284) v1@30.48,67.284 ; R1.1@29.921,65.532 30.48,66.091 v1(30.48,67.31) ; R1.1@29.921,65.728 ccw(c29.921,66.201) R1.1@30.256,65.867 ; R1.1@30.177,65.326 ccw(c29.446,66.057) 30.48,66.057 ; v1(31.115,27.305) R54.1@31.115,29.134 ; Q2.2@36.432,54.434 ccw(c36.085,54.781) 36.576,54.781 ccw(c37.067,54.781) 36.72,54.434 ccw(c37.067,54.781) 37.067,54.29 ccw(c37.067,53.799) Q2.2@36.72,54.146 ; v1(36.576,55.88) Q2.2@36.576,54.29 37.861,54.29 R11.2@38.1,54.051 ; 37.121,54.29 cw(c37.121,53.122) R11.2@37.947,53.948 ; v1(38.1,12.7) C20.2@38.1,15.164 ; C7.2@53.467,12.776 v1(53.467,14.605) ; v1(73.66,55.88) 73.884,55.656 J6.2@76.2,55.656 80.234,55.656 v1(81.28,54.61) ; v1@73.696,55.916 ccw(c74.323,56.543) 74.323,55.656 ; 78.359,12.624 78.435,12.7 ; v1(84.455,20.828) C2.1@85.649,20.828 85.61,20.867 X1.4@85.61,22.545 ; 85.61,21.324 ccw(c86.095,21.324) C2.1@85.752,20.981 ; 85.725,32.456 C6.1@85.725,33.579 85.776,33.528 R6.2@87.376,33.528 ; C6.1@85.878,33.682 ccw(c86.25,34.054) 86.25,33.528 ; v1(86.36,17.145) 87.071,17.856 C33.1@87.071,19.05 v1(88.9,19.05) 88.941,19.091 88.941,22.614 X1.2@87.11,24.445 ; 86.851,33.528 ccw(c86.851,34.054) R6.2@87.223,33.682 ; C38.1@86.968,26.009 cw(c86.625,25.666) 87.11,25.666 ; C38.1@86.968,26.315 ccw(c86.625,26.658) 87.11,26.658 ; C27.1@86.968,27.787 cw(c86.625,27.444) 87.11,27.444 ; C27.1@86.968,28.093 ccw(c86.625,28.436) 87.11,28.436 ; R19.2@86.968,29.438 cw(c86.625,29.095) 87.11,29.095 ; C27.1@87.071,27.94 C27.1@87.11,27.94 ; R19.2@87.071,29.591 R19.2@87.249,29.591 ; R19.2@87.071,29.787 ccw(c87.071,30.689) 87.709,30.051 ; X1.2@87.11,24.249 cw(c87.11,23.776) X1.2@87.445,24.11 ; 87.376,32.419 R6.2@87.376,33.528 ; R6.2@87.376,33.579 R6.2@87.376,33.528 ; R6.2@87.529,33.682 ccw(c87.901,34.054) 87.901,33.528 ; v1(88.9,24.511) 87.176,24.511 X1.2@87.11,24.445 ; v1(88.9,26.162) C38.1@87.11,26.162 ; v1(88.9,27.94) C27.1@87.11,27.94 ; v1(88.9,29.591) R19.2@87.249,29.591 ; X1.2@87.11,24.445 C38.1@87.11,26.123 ; C38.1@87.11,26.123 C38.1@87.071,26.162 C38.1@87.11,26.162 ; C38.1@87.11,26.123 C38.1@87.11,26.162 ; C38.1@87.11,26.162 C27.1@87.11,27.94 ; C27.1@87.11,27.94 87.11,29.452 R19.2@87.249,29.591 ; R19.2@87.249,29.591 88.9,31.242 v1(88.9,33.528) R6.2@87.376,33.528
  Top Layer w0.66: XX1.1@78.359,9.525 78.359,12.624
  Top Layer w0.762: v1(38.735,67.31) 38.735,62.611 41.336,60.01 Q1.E@42.164,60.01 ; v1(45.72,67.31) 47.625,67.31 48.971,65.964 R17.1@48.971,64.262 ; v1(46.355,30.48) 47.498,31.623 C45.1@47.549,31.623 C43.2@47.549,35.56 47.549,35.636 v1(46.355,36.83) ; v1(51.435,62.611) R16.1@48.971,62.611 R17.1@48.971,64.262 ; v1(51.435,64.262) R17.1@48.971,64.262 ; C39.2@62.941,36.83 v1(66.04,36.83) ; v1@66.634,19.621 ccw(c66.894,20.025) 67.234,19.685 ; v1@66.675,19.609 ccw(c66.675,20.774) 67.499,19.95 ; v1(66.675,19.685) 67.234,19.685 ; v1(66.675,20.955) C36.1@68.504,20.955 ; v1(66.675,22.86) C35.1@68.504,22.86 C36.1@68.504,20.955 ; v1(66.675,27.305) 68.504,27.305 C34.2@68.58,27.381 ; C12.2@67.564,29.22 cw(c67.564,28.324) 68.197,28.958 ; C12.2@67.945,29.985 67.945,29.845 v1(67.945,29.21) 68.58,28.575 C34.2@68.58,27.381 ; 70.22,29.021 ccw(c69.396,29.845) v1@70.561,29.845 ; v1(70.485,29.845) 70.485,29.286 ; v1@70.549,29.886 cw(c70.145,29.626) 70.485,29.286 ; J1.7@71.69,7.889 ccw(c71.69,8.538) 72.149,8.079 ; v1(71.755,5.08) 71.69,5.145 J1.7@71.69,7.62 ; v1(71.755,10.795) 71.69,10.73 J1.7@71.69,7.62 ; v1(73.025,8.89) 72.96,8.89 J1.7@71.69,7.62 ; C42.2@73.723,31.052 cw(c72.341,29.67) 74.295,29.67 ; C42.2@73.73,31.047 cw(c73.459,30.256) 74.295,30.256 ; v1(74.295,14.605) 74.854,15.164 C28.1@75.565,15.164 v1(75.565,13.335) ; v1(74.295,29.21) 74.295,30.48 73.736,31.039 C42.2@73.736,31.115 C41.2@73.736,33.02 73.736,33.096 v1(74.93,34.29) 76.124,33.096 C44.1@76.124,33.02 ; v1@74.354,14.664 cw(c75.515,13.503) C28.1@75.515,15.145 ; v1@82.474,13.325 ccw(c83.185,13.416) 83.185,12.7 ; v1@82.609,13.286 cw(c81.356,14.331) C32.1@81.356,12.7 83.185,12.7 ; v1(83.82,13.335) 83.185,12.7 ; 67.234,19.685 C36.1@68.504,20.955 ; C34.2@68.58,27.381 70.485,29.286
  Top Layer w1.016: v1(1.905,34.29) C4.2@7.125,34.29 ; v1(1.905,41.91) C19.2@7.125,41.91 ; v1(1.905,49.53) C10.2@7.125,49.53 ; 15.24,17.78 v1(15.24,19.685) v1(15.24,21.59) C1.2@15.24,26.035 ; 15.24,24.666 cw(c17.184,24.666) C1.2@15.809,26.041 ; C1.2@15.24,25.46 cw(c15.823,25.46) C1.2@15.815,26.043 ; 15.24,27.404 ccw(c17.184,27.404) C1.2@15.809,26.029 ; 15.24,42.412 cw(c18.015,42.412) C11.2@16.053,44.374 ; 15.24,44.825 cw(c18.015,44.825) C5.2@16.053,46.787 ; v1@15.24,46.742 ccw(c18.015,46.742) C11.2@16.053,44.78 ; v1(15.24,52.07) 8.255,52.07 7.125,50.94 C10.2@7.125,49.53 ; C11.2@16.053,44.577 15.24,44.577 ; C5.2@16.053,46.99 v1(15.24,46.99) 15.24,44.577 ; C1.2@16.256,26.035 C1.2@15.24,26.035 ; C8.2@17.958,31.115 v1(15.24,31.115) ; C21.2@19.05,19.482 v1(19.05,17.78) ; v1(21.209,52.07) 26.162,52.07 29.845,48.387 v1(29.845,47.625) ; v1(29.21,33.655) 29.065,33.655 23.255,39.465 U1.1@23.255,40.542 29.308,40.542 v1(29.845,40.005) v1(29.845,38.1) ; v1@29.285,15.686 ccw(c28.959,16.51) 29.845,16.51 ; v1@29.354,16.019 cw(c28.168,14.833) 29.845,14.833 ; 29.845,7.392 ccw(c31.522,7.392) v1@30.336,6.206 ; v1@30.277,6.35 ccw(c31.319,6.35) 30.582,5.613 ; v1@30.524,6.152 cw(c30.366,6.871) 29.845,6.35 ; v1(31.75,33.02) C24.1@31.75,34.722 ; 32.385,5.17 31.025,5.17 29.845,6.35 ; 32.385,14.732 J4.1@32.385,10.16 ; 33.136,5.932 ccw(c33.136,6.869) v1@33.799,6.206 ; v1@33.511,6.206 ccw(c34.174,6.869) 34.174,5.932 ; 34.823,12.598 cw(c35.56,11.861) v1@35.56,12.903 ; C23.2@35.56,15.037 v1(35.56,12.7) 34.925,12.7 ; v1@35.604,12.898 ccw(c35.446,12.179) 34.925,12.7 ; 36.311,5.932 ccw(c36.311,6.869) v1@36.974,6.206 ; v1(36.576,55.88) v1(45.72,55.88) v1(47.625,55.88) v1(50.165,55.88) v1(52.07,55.88) ; v1@36.686,6.206 ccw(c37.349,6.869) 37.349,5.932 ; v1(38.1,12.7) 35.56,10.16 J4.1@32.385,10.16 ; 39.486,5.932 ccw(c39.486,6.869) SET1.1@40.149,6.206 ; SET1.1@39.861,6.206 ccw(c40.524,6.869) SET1.1@40.524,5.932 ; 43.296,5.932 ccw(c43.296,6.869) v1@43.959,6.206 ; v1@43.671,6.206 ccw(c44.334,6.869) 44.334,5.932 ; J2.3@53.277,7.62 51.589,5.932 32.385,5.932 J4.1@32.385,10.16 ; v1(58.42,27.94) 64.135,27.94 v1(66.04,29.845) 67.945,29.845 v1(69.215,29.845) v1(70.485,29.845) ; 66.391,29.845 ccw(c66.391,31.412) C12.2@67.499,30.304 ; 66.903,29.845 cw(c66.903,28.168) C12.2@68.089,29.354 ; C12.2@67.629,30.304 ccw(c68.737,31.412) 68.737,29.845 ; C12.2@67.801,29.354 cw(c68.987,28.168) v1@68.987,29.845 ; v1(75.565,13.335) 76.609,12.291 XX1.2@76.609,9.775 ; C10.2@7.125,49.53 7.125,26.53 8.128,25.527 8.128,18.542 8.89,17.78 v1(19.05,17.78) ; C1.2@15.24,26.035 v1(15.24,31.115) ; v1(15.24,31.115) v1(15.24,34.29) v1(15.24,37.465) v1(15.24,40.005) v1(15.24,43.18) 15.24,44.577 ; v1(19.05,17.78) v1(21.59,17.78) 23.749,17.78 28.575,17.78 v1(29.21,17.145) 29.845,16.51 ; 29.845,6.35 J4.2@29.845,10.16 ; J4.2@29.845,10.16 J4.1@32.385,10.16 ; J4.2@29.845,10.16 29.845,16.51 ; J4.1@32.385,10.16 34.925,12.7
  Bottom Layer w0.508: v1(84.455,20.828) v1(84.455,22.225)
  Bottom Layer w0.762: v1(46.355,36.83) 46.355,50.165 v1(52.07,55.88) ; v1@66.599,27.305 cw(c67.948,27.305) 66.994,28.259 ; v1@66.612,27.262 cw(c67.052,27.563) 66.675,27.94 ; 68.261,29.526 cw(c69.215,28.572) v1@69.215,29.921 ; v1@69.258,29.908 ccw(c68.957,29.468) 68.58,29.845 ; v1(71.755,5.08) 71.69,5.145 J1.7@71.69,7.62 v1@71.69,13.335 ; 72.946,29.845 cw(c72.946,27.861) v1@74.349,29.264 ; v1@74.241,29.264 cw(c75.644,27.861) 75.644,29.845 ; v1(74.295,29.21) 74.295,29.845 ; v1(75.565,13.335) v1(74.295,13.335) v1(73.025,13.335) v1@71.69,13.335 ; v1(88.9,27.94) 86.36,27.94 84.455,29.845 v1(76.962,29.845) 74.295,29.845 ; 66.675,27.94 v1(67.945,29.21) 68.58,29.845 ; 66.675,27.94 v1(66.675,27.305) v1(66.675,25.4) v1(66.675,22.86) v1(66.675,20.955) v1(66.675,19.685) v1(66.675,18.415) v1(66.675,17.145) v1(66.675,14.605) 67.945,13.335 v1@71.69,13.335 ; 68.58,29.845 v1(69.215,29.845) v1(70.485,29.845) 74.295,29.845
  Bottom Layer w1.016: v1(1.905,49.53) v1(1.905,45.72) v1(1.905,41.91) v1(1.905,38.1) v1(1.905,34.29) v1(1.905,30.48) v1(1.905,27.94) v1(1.905,24.765) v1(1.905,21.59) v1(1.905,19.05) v1(1.905,17.145) v1(1.905,14.605) v1(1.905,12.065) v1(1.905,10.16) 3.556,8.509 v1(12.065,8.509) ; v1(15.24,46.99) v1(15.24,52.07) v1(21.209,52.07) ; v1(26.924,67.31) v1(30.48,67.31) v1(32.385,67.31) v1(34.29,67.31) v1(36.83,67.31) v1(38.735,67.31) v1(40.64,67.31) v1(42.545,67.31) v1(44.196,67.31) v1(45.72,67.31) v1(45.72,55.88) ; v1(29.21,15.875) 29.21,30.48 v1(31.75,33.02) ; 29.845,7.392 ccw(c31.522,7.392) v1@30.336,6.206 ; v1(29.845,38.1) v1(29.845,40.005) v1(29.845,42.545) v1(29.845,47.625) ; J4.2@30.137,10.36 cw(c33.425,10.36) 31.1,12.685 ; v1@30.277,6.35 ccw(c31.319,6.35) 30.582,5.613 ; v1@30.524,6.152 cw(c30.366,6.871) 29.845,6.35 ; v1(33.655,2.54) 29.845,6.35 ; v1(33.655,3.81) 32.385,5.08 J4.1@32.385,10.16 ; v1(38.1,12.7) v1(35.56,12.7) 32.385,12.7 ; v1(40.005,6.35) 36.195,10.16 J4.1@32.385,10.16 ; v1(46.355,30.48) v1(50.8,30.48) v1(53.34,27.94) ; J2.3@53.319,7.42 ccw(c55.851,7.42) 54.061,5.629 ; v1(55.88,3.81) 53.277,6.413 J2.3@53.277,7.62 51.435,9.462 v1(51.435,14.605) 53.34,16.51 v1(53.34,20.32) v1(53.34,22.225) v1(53.34,24.13) v1(53.34,26.035) v1(53.34,27.94) ; v1(58.42,27.94) v1(53.34,27.94) ; 29.845,6.35 J4.2@29.845,10.16 ; J4.2@29.845,10.16 29.845,11.43 31.115,12.7 32.385,12.7 ; J4.2@29.845,10.16 J4.1@32.385,10.16 ; J4.1@32.385,10.16 32.385,12.7
  other v1: 70.485,1.27 71.755,1.27 73.025,1.27 13.335,2.54 15.875,2.54 18.415,2.54 21.59,2.54 24.13,2.54 27.305,2.54 30.48,2.54 36.83,2.54 40.005,2.54 43.815,2.54 46.355,2.54 48.895,2.54 70.485,2.54 71.755,2.54 73.025,2.54 13.335,3.81 15.875,3.81 18.415,3.81 21.59,3.81 24.13,3.81 27.305,3.81 30.48,3.81 36.83,3.81 40.005,3.81 43.815,3.81 46.355,3.81 48.895,3.81 58.42,3.81 60.96,3.81 62.865,3.81 64.77,3.81 66.675,3.81 68.58,3.81 70.485,3.81 71.755,3.81 73.025,3.81 70.485,5.08 73.025,5.08 30.48,6.35 33.655,6.35 36.83,6.35 43.815,6.35 73.025,6.35 73.025,7.62 3.81,8.509 8.255,8.509 74.295,8.89 71.755,9.525 73.025,10.795 74.295,10.795 75.565,10.795 81.28,10.795 82.55,10.795 83.82,10.795 85.09,10.795 86.36,10.795 87.63,10.795 88.9,10.795 90.17,10.795 91.44,10.795 92.71,10.795 93.98,10.795 95.25,10.795 96.52,10.795 97.79,10.795 99.06,10.795 71.755,11.938 73.025,11.938 74.295,11.938 75.565,11.938 81.28,11.938 82.55,11.938 83.82,11.938 85.09,11.938 86.36,11.938 87.63,11.938 88.9,11.938 90.17,11.938 91.44,11.938 92.71,11.938 93.98,11.938 95.25,11.938 96.52,11.938 97.79,11.938 99.06,11.938 40.64,12.7 43.815,12.7 46.355,12.7 60.96,13.335 66.675,13.335 71.755,13.335 82.55,13.335 85.09,13.335 86.36,13.335 87.63,13.335 88.9,13.335 90.17,13.335 91.44,13.335 92.71,13.335 93.98,13.335 95.25,13.335 96.52,13.335 97.79,13.335 99.06,13.335 20.32,14.605 22.225,14.605 48.26,14.605 73.025,14.605 76.835,14.605 80.01,14.605 81.28,14.605 82.55,14.605 83.82,14.605 85.09,14.605 86.36,14.605 87.63,14.605 88.9,14.605 90.17,14.605 91.44,14.605 92.71,14.605 93.98,14.605 95.25,14.605 96.52,14.605 97.79,14.605 99.06,14.605 74.295,15.875 76.835,15.875 80.01,15.875 81.28,15.875 82.55,15.875 83.82,15.875 85.09,15.875 86.36,15.875 87.63,15.875 88.9,15.875 90.17,15.875 91.44,15.875 92.71,15.875 93.98,15.875 95.25,15.875 96.52,15.875 97.79,15.875 99.06,15.875 76.835,17.145 80.01,17.145 81.28,17.145 82.55,17.145 83.82,17.145 85.09,17.145 17.145,17.78 60.96,18.415 80.01,18.415 81.28,18.415 82.55,18.415 57.785,19.685 80.01,19.685 81.28,19.685 46.355,20.32 50.8,20.32 60.96,20.955 80.01,20.955 88.941,20.955 46.355,22.225 50.8,22.225 57.785,22.225 88.9,22.606 76.073,23.368 76.835,23.368 77.597,23.368 46.355,24.13 50.8,24.13 76.073,24.13 76.835,24.13 77.597,24.13 76.073,24.892 76.835,24.892 77.597,24.892 46.355,26.035 50.8,26.035 57.785,26.035 60.325,26.035 46.355,27.94 50.8,27.94 60.325,27.94 46.355,32.385 29.845,33.02 73.66,34.29 76.835,34.29 46.355,34.925 69.215,36.83 71.12,36.83 73.025,36.83 49.53,40.64 52.07,40.64 52.07,46.99 52.07,50.165 52.07,53.34 21.59,53.975 19.05,67.31 21.59,67.31 24.765,67.31
GREEN: J3.3 LED1.2 RE1.1 | length 10.3
  Top Layer w0.508: J3.3@90.805,53.372 90.849,53.416 RE1.1@93.98,53.416 ; J3.3@91.156,53.021 cw(c92.109,52.068) 92.109,53.416 ; J3.3@91.156,53.723 ccw(c91.896,54.463) 91.896,53.416
  Bottom Layer w0.406: LED1.2@88.138,54.559 89.325,53.372 J3.3@90.805,53.372 ; J3.3@90.418,52.985 ccw(c89.485,52.052) 89.485,53.372 ccw(c89.485,54.692) J3.3@90.418,53.759
IRQ_TSM12: J5.3 J6.3 U6.6 | length 44.4
  Top Layer w0.2: J6.3@76.2,56.906 82.159,56.906 83.82,55.245 83.82,27.305 81.245,24.73 U6.6@78.581,24.73 ; J5.3@76.927,56.729 cw(c77.354,56.302) 77.354,56.906 cw(c77.354,57.51) J5.3@76.927,57.083 ; J5.3@76.927,56.749 cw(c77.305,56.371) 77.305,56.906 ; J5.3@76.927,57.103 ccw(c77.402,57.578) 77.402,56.906
M3V3: C12.1 C20.1 C23.1 C39.1 C41.1 C42.1 J1.1 J4.3 J5.1 J6.1 R2.1 R3.1 T2.S U4.2 U6.16 UB1.8 | length 147.1
  Top Layer w0.406: 73.66,27.305 74.835,26.13 75.332,26.13
  Top Layer w0.762: U4.2@25.58,19.304 29.398,19.304 T2.S@29.464,19.37 v1(31.054,17.78) 35.56,17.78 ; C23.1@35.56,16.713 35.56,17.78 ; C20.1@38.1,16.586 38.1,17.78 ; v1(56.515,36.83) v1(56.515,35.56) 56.515,34.95 ; v1(56.515,53.34) v1(57.581,54.406) J6.1@76.2,54.406 ; 56.591,34.366 57.099,34.366 ; J1.1@59.69,7.62 59.69,10.16 56.515,13.335 56.515,16.51 ; 61.519,34.544 C39.1@61.519,36.83 ; 73.66,27.305 72.314,28.651 C42.1@72.314,31.115 C41.1@72.314,33.02 70.968,34.366 R3.1@62.865,34.366 R2.1@60.96,34.366 57.099,34.366 ; 35.56,17.78 38.1,17.78 ; 38.1,17.78 55.245,17.78 ; 55.245,17.78 56.515,19.05 ; 55.245,17.78 56.515,17.78 ; 55.245,17.78 56.515,16.51 ; 56.515,16.51 56.515,17.78 ; 56.515,17.78 56.515,19.05 ; 56.515,19.05 56.515,33.782 ; 56.515,33.782 57.099,34.366 ; 56.515,33.782 56.515,34.95 ; 56.515,34.95 57.099,34.366
  Bottom Layer w0.254: J4.3@27.014,10.967 ccw(c26.791,11.43) 27.305,11.43 ; J4.3@27.305,10.16 27.305,11.43 ; J4.3@27.596,10.967 cw(c27.819,11.43) 27.305,11.43 ; v1@30.928,17.654 cw(c30.625,17.351) 31.054,17.351 cw(c31.483,17.351) v1@31.18,17.654 ; v1(31.054,17.78) 31.054,15.179 27.305,11.43
  Bottom Layer w0.762: v1(56.515,35.56) v1(56.515,36.83) v1(56.515,53.34) v1(57.581,54.406)
NC: J4.5 U5.1 | length 97.9
  Bottom Layer w1.016: U5.1@15.24,64.135 15.24,65.405 14.605,66.04 v1(13.97,66.04) 12.065,66.04 2.54,66.04 0,63.5 0,8.89 1.905,6.985 20.955,6.985 22.225,8.255 J4.5@22.225,10.16
  other v1: 11.43,66.04
NetBZ1_1: BZ1.1 C24.2 D5.K R47.1 | length 22
  Top Layer w0.762: D5.K@30.48,52.169 v1(32.004,50.645) ; C24.2@31.75,36.398 34.163,36.398 R47.1@34.29,36.271 BZ1.1@34.29,41.275 ; BZ1.1@33.923,40.908 cw(c33.037,40.022) 34.29,40.022 cw(c35.543,40.022) BZ1.1@34.657,40.908
  Bottom Layer w0.762: v1(32.004,50.645) 32.004,43.561 BZ1.1@34.29,41.275
NetBZ1_2: BZ1.2 D5.A Q2.3 | length 16.3
  Top Layer w0.508: D5.A@30.48,56.769 33.49,56.769 34.544,55.715 Q2.3@34.544,53.34 34.29,53.086 BZ1.2@34.29,47.625 ; BZ1.2@33.833,48.082 ccw(c32.73,49.185) 34.29,49.185 ccw(c35.85,49.185) BZ1.2@34.747,48.082 ; BZ1.2@33.901,47.879 BZ1.2@34.155,47.625 ; 34.29,52.46 cw(c35.331,52.46) Q2.3@34.595,53.196
NetC2_2: C2.2 U6.2 X1.1 | length 14.3
  Top Layer w0.2: U6.2@78.581,23.13 82.82,23.13 83.185,23.495 86.233,23.495 87.11,22.618 X1.1@87.11,22.545 87.11,20.867 C2.2@87.071,20.828 ; 86.582,23.146 cw(c86.03,22.595) X1.1@86.81,22.595 ; 86.637,23.091 ccw(c87.11,23.564) X1.1@87.11,22.895 ; C2.2@86.859,21.09 ccw(c86.253,21.696) 87.11,21.696 ; X1.1@86.898,22.283 cw(c86.386,21.771) 87.11,21.771 cw(c87.834,21.771) X1.1@87.322,22.283 ; 87.11,21.509 ccw(c87.702,21.509) C2.2@87.283,21.09
NetC29_1: 
NetC29_2: C30.2 C32.2 | length 1.6
  Top Layer w0.66: C30.2@78.359,12.624 79.858,12.624 C32.2@79.934,12.7
NetC30_1: C30.1 L2.1 | length 1.8
  Top Layer w0.66: C30.1@78.359,14.046 L2.1@78.359,15.799
NetC34_1: C34.1 U6.19 | length 8
  Top Layer w0.178: C34.1@68.58,25.959 69.809,24.73 U6.19@74.581,24.73 ; C34.1@68.63,25.648 cw(c68.63,25.017) 69.076,25.463 ; C34.1@68.763,25.959 ccw(c69.206,25.959) C34.1@68.893,25.646 ; C34.1@68.941,25.959 ccw(c69.813,25.959) 69.196,25.342
NetC37_1: C37.1 U6.17 | length 6.5
  Top Layer w0.178: C37.1@70.485,27.381 70.663,27.381 72.514,25.53 U6.17@74.581,25.53 ; C37.1@70.535,27.07 cw(c70.535,26.011) 71.284,26.76 ; C37.1@70.535,27.248 cw(c70.535,26.618) 70.981,27.063 ; C37.1@70.846,27.381 ccw(c71.289,27.381) 70.976,27.068
NetC37_2: C37.2 U6.18 | length 6
  Top Layer w0.178: C37.2@70.485,25.959 71.314,25.13 U6.18@74.581,25.13 ; C37.2@70.535,25.648 cw(c70.535,25.017) 70.981,25.463 ; C37.2@70.668,25.959 ccw(c71.111,25.959) C37.2@70.798,25.646 ; C37.2@70.846,25.959 ccw(c71.718,25.959) 71.101,25.342
NetC38_2: C38.2 U6.3 X1.3 | length 12.6
  Top Layer w0.2: U6.3@78.581,23.53 82.27,23.53 83.185,24.445 X1.3@85.61,24.445 85.649,24.484 C38.2@85.649,26.162 ; X1.3@85.398,24.233 ccw(c84.886,23.721) 84.886,24.445 ccw(c84.886,25.169) X1.3@85.398,24.657 ; X1.3@85.398,24.707 ccw(c84.792,25.313) 85.649,25.313 ; C38.2@85.437,25.9 cw(c84.925,25.388) 85.649,25.388 cw(c86.373,25.388) C38.2@85.861,25.9 ; 85.649,25.126 ccw(c86.241,25.126) X1.3@85.822,24.707
NetC43_1: C43.1 UB1.1 Y2.2 | length 10
  Top Layer w0.203: C43.1@48.971,35.212 cw(c48.971,34.37) 49.566,34.965 ; C43.1@48.971,35.56 50.241,34.29 UB1.1@53.28,34.29 ; C43.1@49.27,35.51 ccw(c49.869,35.51) 49.445,35.086 ; 49.448,35.084 ccw(c50.515,36.151) Y2.2@50.515,34.641 ; 49.795,34.737 ccw(c50.515,35.457) Y2.2@50.515,34.438 ; Y2.2@51.061,34.047 cw(c51.649,33.459) 51.649,34.29 ; Y2.2@51.061,34.539 ccw(c51.663,35.142) 51.663,34.29 ; UB1.1@52.69,34.15 ccw(c52.351,33.811) 52.351,34.29 ccw(c52.351,34.769) UB1.1@52.69,34.43